# Altium PCB Car-PCB1.PcbDoc (part 4 of 4)
Units mil, origin at the board's own origin, x right, y up, seen from the top; angles counter-clockwise.
Board outline 2206 x 4474.17 mil, 4 copper layers (L1_Top, L2_GND, L3_PWR, L4_BOT), stack 60.912 mil thick; 163 components, 139 nets, 610 pads, 297 vias.
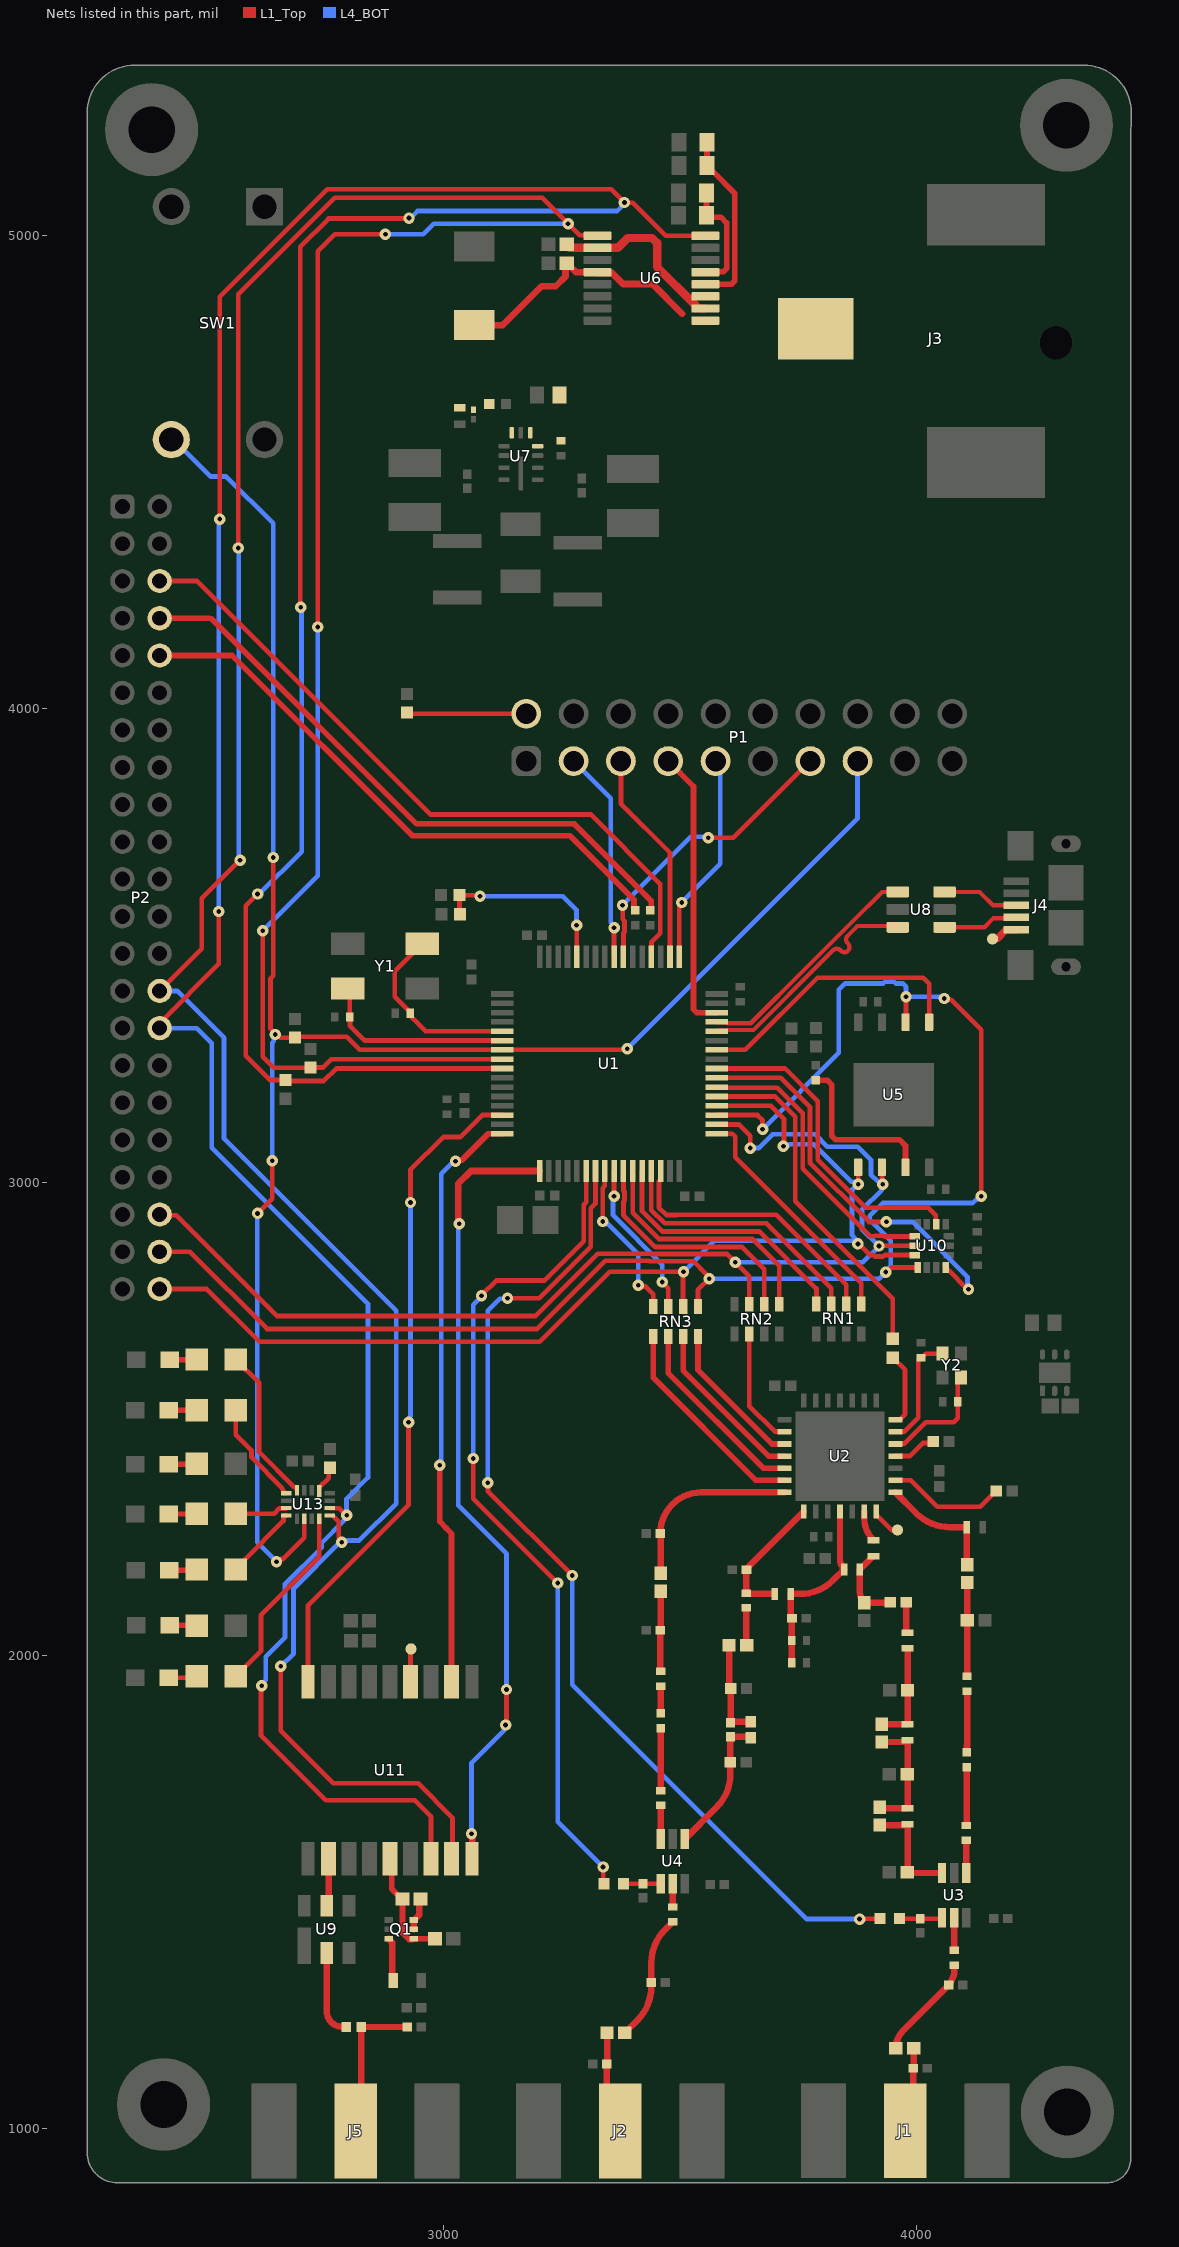
[diagram p5: the nets of this part, all layers, seen from the top]

## Via types
v1: diameter 24, hole 10, L1_Top to L4_BOT, 281 vias
v2: diameter 19.68, hole 7.87, L1_Top to L4_BOT, 16 vias

## Nets (pads, with @x,y where several pads share a name; then routed paths per layer and width w, separated by ;. In a path a pad name is that pad's centre, name@x,y a point inside that pad or via, vN(x,y) a via of type N, cw(c..) or ccw(c..) an arc to the next point about the centre after c; other vN are vias at no path point) (continued)
GPS_RESET#: U1.14 U11.9 | length 1412.7
  L1_Top w10: U11.9@2714.57,1944.88 2714.57,2105.57 2927,2318 v1(2927,2493) ; v1(2931,2957) 2931,3026 3000.37,3095.37 3036.37,3095.37 3082.73,3141.73 U1.14@3125.02,3141.73
  L4_BOT w10: v1(2927,2493) 2929.68,2495.68 2929.68,2504.54 2931,2505.86 v1(2931,2957)
GPS_SAFEBOOT#: U1.17 U11.18 | length 1683.9
  L1_Top w10: v1(3132,1853) 3132,1859 3134,1861 v1(3134,1928)
  L1_Top w13.78: v1(3034,2912) 3032.04,2913.96 3032.04,2921.18 3032,2921.23 3032,2997 3058.62,3023.62 U1.17@3203.76,3023.62 ; v1(3060,1623.3) 3061.02,1622.28 U11.18@3061.02,1570.87
  L4_BOT w10: v1(3034,2912) 3032,2910 3032,2317 3134,2215 v1(3134,1928) ; v1(3060,1623.3) 3060,1773 3129.32,1842.32 3129.32,1850.32 v1(3132,1853)
GPS_TX_READY: U1.16 U11.2 | length 1248.6
  L1_Top w11.81: v1(2993,2402) 2993,2282.7 3006.09,2269.61 3006.09,2269.01 3017.72,2257.39 U11.2@3017.72,1944.88 ; v1(3026,3044) 3028.33,3046.33 3039.33,3046.33 3095.36,3102.36 U1.16@3125.02,3102.36
  L4_BOT w10: v1(2993,2402) 2995.68,2404.68 2995.68,2414.54 2996,2414.86 2996,3018 3015,3037 3015.21,3037 3022.21,3044 v1(3026,3044)
Header_LED: D8.2 U13.4 | length 332.2
  L1_Top w9.84: D8.2@2562.09,2625.2 2611,2576.28 2611,2429.88 2685.31,2355.57 2690.45,2355.57 2690.95,2355.08 U13.4@2690.95,2349.41
I2C2_SCL: P2.28 R5.1 U1.8 U6.9 U11.17 U13.13 | length 7748.3
  L1_Top w10: P2.28@2401,3404.12 2490,3493.12 2490,3599.64 v1@2570.68,3680.32 ; v1(2567,4340) 2567,4876 2771,5080 3209,5080 v1(3264,5025) 3288.4,5000.6 3324.79,5000.6 U6.9@3325.83,4999.57 ; v1(2619,3531) 2619,3265 2642,3242 R5.1@2720,3242 ; v1(2657,1977) 2657,1841 2768,1730 2947,1730 3019.68,1657.32 3019.68,1572.83 U11.17@3017.72,1570.87 ; R5.1@2720,3242.32 2746.32,3242.32 2763.84,3259.84 U1.8@3125.02,3259.84 ; v1(2735,4173) 2735,4967 2771,5003 v1(2878,5003) ; U13.13@2766.65,2294.96 2779.32,2282.29 2779.32,2249.47 2785.56,2243.23 v1(2785.56,2239.44)
  L4_BOT w10: P2.28@2401,3404.12 2437.88,3404.12 2537,3305 2537,3092 2900.74,2728.26 2900.74,2320.74 2823,2243 2798.41,2243 2797.54,2242.12 2788.24,2242.12 v1(2785.56,2239.44) ; v1(2567,4340) 2568,4339 2568,3686.79 2571,3683.79 v1(2571,3680) ; v1(2619,3531) 2735,3647 v1(2735,4173) ; v1(2657,1977) 2684,2004 2684,2141.44 v1@2782.88,2240.32 ; v1(2878,5003) 2958,5003 2980,5025 v1(3264,5025)
I2C2_SDA: P2.30 R6.1 U1.9 U6.8 U11.16 U13.14 | length 8198.8
  L1_Top w10: P2.30@2401,3325.38 2401,3336.19 2526,3461.19 v1(2526,3572) ; v1(2528,4401) 2528,4871 2755,5098 3355,5098 3383.59,5069.41 3400.59,5069.41 3470.43,4999.57 U6.8@3554.17,4999.57 ; v1(2608,3609) 2583,3584 2583,3267 2634.32,3215.68 R6.1@2667,3215.68 ccw(c2668.68,3215.68) 2668.68,3214 2748,3214 2774.16,3240.16 U1.9@3125.02,3240.16 ; v1(2617,1936) 2615,1934 2615,1831 2752,1694 2939.86,1694 2974.41,1659.45 U11.16@2974.41,1570.87 ; v1(2699,4215) 2698,4216 2698,4976 2758,5036 2927,5036 v1(2928,5037) ; U13.14@2760.57,2311.28 2780.72,2311.28 2795.74,2296.26 v1(2796.32,2296.26)
  L4_BOT w10: P2.30@2401,3325.38 2479.62,3325.38 2511,3294 2511,3073 2841,2743 2841,2376 2796,2331 v1@2796,2296.26 ; v1(2526,3572) 2526,4399 v1(2528,4401) ; v1(2608,3609) 2611.79,3609 2701,3698.21 2701,4064.14 2700.68,4064.46 2700.68,4213.32 v1(2699,4215) ; v1(2617,1936) 2617,1939.79 2625,1947.79 2625,1997 2666,2038 2666,2151 2743,2228 2743,2237 2790.2,2284.2 2790.2,2286.35 2796.32,2292.47 v1(2796.32,2296.26) ; v1(2928,5037) 2930.86,5037 2945.86,5052 3368.14,5052 3383,5066.86 v1(3383,5070)
IMU_INT1: U1.39 U10.4 | length 877.8
  L1_Top w10: U1.39@3577.77,3220.47 3713.53,3220.47 3775,3159 3775,3041 3900,2916 3936,2916 v1(3936.56,2916.56) ; U10.4@4059.75,2826.12 4061.64,2824.23 U10.4@4061.64,2819.8 4061.64,2815.37 4063.53,2813.48 4067.96,2813.48 4107.44,2774 v1(4110,2774)
  L4_BOT w10: v1(3936.56,2916.56) 3937.11,2916 3992,2916 4107.91,2800.09 4107.91,2776.09 v1(4110,2774)
IMU_INT2: U1.40 U10.9 | length 683.2
  L1_Top w9.84: U1.40@3577.77,3240.16 3722.52,3240.16 3791.84,3170.84 3791.84,3047.16 3893,2946 4025,2946 4041.11,2929.89 4041.11,2912.18 U10.9@4041.96,2911.33
IMU_LED: D7.2 U13.5 | length 222.9
  L1_Top w9.84: D7.2@2561.71,2518.12 2561.71,2466.53 2595.26,2432.98 2595.26,2418.46 2660.16,2353.56 2660.16,2351.18 2662.4,2348.94 2662.4,2343.27 2668.07,2343.27 U13.5@2668.56,2342.78
JTCK_SWCLK: P1.9 U1.49 | length 453.4
  L1_Top w10: U1.49@3499.03,3476.38 3499.03,3582.25 3504,3587.21 v1(3504,3591)
  L4_BOT w10: v1@3504.09,3591.09 3585.73,3672.73 3585.73,3879.62 P1.9@3575.59,3889.76
JTDI: P1.5 U1.50 | length 456.4
  L1_Top w10: P1.5@3375.59,3889.76 3375.59,3799.41 3479.35,3695.65 U1.50@3479.35,3476.38
JTDO_SWO: P1.13 U1.55 | length 636.4
  L1_Top w10: v1(3379,3585) 3379.7,3584.3 3379.7,3555.36 3383.24,3551.82 3383.24,3528.65 3380.92,3526.33 U1.55@3380.92,3476.38 ; v1(3560,3728) 3613,3728 3774.76,3889.76 P1.13@3775.59,3889.76
  L4_BOT w10: v1(3379,3585) 3379,3586 3424,3631 3523,3730 3558,3730 v1(3560,3728)
JTMS_SWDIO: P1.7 U1.46 | length 598.3
  L1_Top w11.81: P1.7@3475.59,3889.76 3529,3836.35 3529,3365.19 3535.92,3358.27 U1.46@3577.77,3358.27
JTRST: P1.3 U1.56 | length 448.9
  L1_Top w10: U1.56@3361.24,3476.38 v1(3361.24,3537.76)
  L4_BOT w10: P1.3@3275.59,3889.76 3354,3811.35 3354,3548.79 3361.24,3541.55 v1(3361.24,3537.76)
LoRa_DIO_0: RN1.5 U1.33 | length 505.9
  L1_Top w10: U1.33@3577.77,3102.36 3611.14,3102.36 3617,3096.5 3617,3053 3883.24,2786.76 RN1.5@3883.24,2742.5
LoRa_DIO_1: RN1.6 U1.30 | length 583.3
  L1_Top w10: U1.30@3459.66,3023.62 3459.66,3005.91 3455.88,3002.13 3455.88,2946.33 3471.53,2930.68 3493.67,2930.68 3493.99,2931 3704,2931 3851.75,2783.25 RN1.6@3851.75,2742.5
LoRa_DIO_2: RN1.7 U1.29 | length 564.6
  L1_Top w10: U1.29@3439.98,3023.62 3439.98,2941.02 3468,2913 3683,2913 3820.25,2775.75 RN1.7@3820.25,2742.5
LoRa_DIO_3: RN1.8 U1.28 | length 553.8
  L1_Top w10: U1.28@3420.29,3023.62 3420.29,2938.71 3463,2896 3668,2896 3788.76,2775.24 RN1.8@3788.76,2742.5
LoRa_DIO_4: RN2.5 U1.27 | length 525.2
  L1_Top w10: U1.27@3400.61,3023.62 3400.61,2935.39 3456,2880 3653,2880 3710,2823 RN2.5@3710,2742
LoRa_DIO_5: RN2.6 U1.26 | length 514.6
  L1_Top w10: U1.26@3380.92,3023.62 3380.92,2981.67 3383.24,2979.35 3383.24,2961.13 3380.92,2958.81 3380.92,2930.08 3448,2863 3632,2863 3678.5,2816.5 RN2.6@3678.5,2742
LoRa_FEM_CPS: R11.1 U1.23 | length 2157.9
  L1_Top w10: v1(3094,2365) 3094.59,2364.41 3094.59,2347.41 v1(3273,2169) ; v1(3136,2755) 3203,2755 3312,2864 3312,2945 3321.87,2954.87 U1.23@3321.87,3023.62 ; v1(3879.92,1442.91) 3880.91,1443.9 R11.1@3923.23,1443.9
  L4_BOT w10: v1(3094,2365) 3094,2728 3119.41,2753.41 3134.41,2753.41 v1(3136,2755) ; v1(3273,2169) 3273,1938 3768.09,1442.91 v1(3879.92,1442.91)
LoRa_FEM_CTX: R14.1 U1.22 | length 1778.7
  L1_Top w10: v1(3063.77,2416) 3063.77,2331.23 v1(3242,2153) ; v1(3081,2760) 3081,2761 3112,2792 3214,2792 3297,2875 3297,2952.63 3302.18,2957.82 U1.22@3302.18,3023.62 ; v1(3338,1553) 3338.58,1552.42 3338.58,1518.7 R14.1@3339.57,1517.72
  L4_BOT w10: v1(3063.77,2416) 3063.77,2741.14 3081,2758.38 v1(3081,2760) ; v1(3242,2153) 3242,1649 v1(3338,1553)
LoRa_LED: D3.2 U13.8 | length 161.5
  L1_Top w10: D3.2@2561.71,2181.49 2580.33,2200.11 2580.33,2202.04 2662.48,2284.19 2662.48,2294.96 2663.05,2295.53 U13.8@2668.56,2295.53
LoRa_Reset#: R18.2 U1.37 | length 738.4
  L1_Top w10: U1.37@3577.77,3181.1 3700.9,3181.1 3744,3138 3744,2960 3950,2754 R18.2@3950,2669
LoRa_RXTX: RN3.8 U1.24 | length 344
  L1_Top w10: v1(3337,2917) 3337,2987.54 3341.55,2992.09 U1.24@3341.55,3023.62 ; v1(3412,2782) 3414.59,2779.41 3427.59,2779.41 3444.01,2762.99 RN3.8@3444.01,2737
  L4_BOT w10: v1(3337,2917) 3340.79,2917 3346.88,2910.91 3349.09,2910.91 3412,2848 v1(3412,2782)
MCU_Reset: P1.15 R3.1 SW1.4 U1.7 U13.10 | length 4210.7
  L1_Top w10: v1(2608,2934) 2639,2965 v1(2639,3045) ; v1(2641,3686) 2641,3436 2635,3430 2635,3324.86 2645,3314.86 v1(2645,3312) 2648.79,3312 2655.79,3305 2686.68,3305 R3.1@2687,3305.32 ; v1(2648,2198) 2651.79,2198 2657.38,2203.59 2661.59,2203.59 2706.69,2248.69 U13.10@2706.69,2288.9 ; R3.1@2687,3307 2796,3307 2823.47,3279.53 U1.7@3125.02,3279.53 3386.53,3279.53 v1(3389,3282)
  L4_BOT w10: SW1.4@2425.57,4568.94 2431.06,4568.94 2509,4491 2542,4491 2641,4392 v1(2641,3686) ; v1(2608,2934) 2607,2933 2607,2239 v1(2648,2198) ; v1(2639,3045) 2639,3294.21 2642.32,3297.53 2642.32,3309.32 v1(2645,3312) ; v1(3389,3282) 3875.59,3768.59 P1.15@3875.59,3889.76
MISO_sx: RN3.4 U2.17 | length 318.4
  L1_Top w11.81: RN3.4@3538.5,2674.01 3538.5,2603.5 3695.15,2446.85 U2.17@3721.46,2446.85
MOSI_sx: RN3.3 U2.18 | length 361.3
  L1_Top w11.81: RN3.3@3507,2674.01 3507,2602 3687.74,2421.26 U2.18@3721.46,2421.26
NetC9_1: C9.1 C10.1 L15.2 | length 198.5
  L1_Top w13.64: C10.1@4107,1955.75 4107.16,1955.91 C9.1@4107.16,2074 4107,2074.16 L15.2@4107,2154.16
NetC10_2: C10.2 R8.1 | length 116.3
  L1_Top w13.64: 4106.3,1808.15 ccw(c4104.61,1809.84) 4107,1809.84 C10.2@4107,1924.25
NetC11_1: C11.1 R8.2 | length 123.4
  L1_Top w13.64: C11.1@4105.32,1640.75 4106.3,1641.73 R8.2@4106.3,1763.78
NetC11_2: C11.2 U3.1 | length 68.9
  L1_Top w13.64: U3.1@4105.32,1540.35 C11.2@4105.32,1609.25
NetC15_1: C15.1 C65.1 L3.1 L12.2 | length 214.9
  L1_Top w13.64: C15.1@3927,1854.84 ccw(c3928.23,1856.07) 3928.23,1854.33 L3.1@3981.3,1854.33 C65.1@3981.3,1926.18 L12.2@3981.3,2014.76
NetC15_2: C15.2 C19.1 C62.1 L3.2 L4.1 | length 259.1
  L1_Top w13.64: C62.1@3922.24,1679.27 ccw(c3927.34,1684.37) 3927.34,1677.17 L4.1@3981.3,1677.17 3981.3,1746.98 ccw(c3978.42,1746.98) C19.1@3980.46,1749.02 ccw(c3978.42,1751.05) 3981.3,1751.05 L3.2@3981.3,1820.87 cw(c3972.35,1829.82) 3972.35,1817.16 C15.2@3927,1817.16
NetC16_1: C16.1 C18.1 L2.2 L5.2 | length 168.5
  L1_Top w13.64: L2.2@3909.45,2209.65 ccw(c3909.45,2207.06) 3907.62,2208.89 L5.2@3880.73,2182 3880.73,2133.16 ccw(c3911.57,2133.16) C18.1@3889.76,2111.36 3942.84,2111.36 ccw(c3942.84,2114.24) C16.1@3944.88,2112.2
NetC16_2: C16.2 L12.1 | length 64.7
  L1_Top w13.64: C16.2@3978.63,2112.2 3978.63,2054.68 ccw(c3987.75,2054.68) L12.1@3981.3,2048.23
NetC17_1: C17.1 U3.5 | length 68.9
  L1_Top w13.64: C17.1@4079.72,1376.97 U3.5@4079.72,1445.87
NetC17_2: C17.2 C63.1 L13.1 | length 222.1
  L1_Top w13.64: L13.1@3956.55,1170.28 cw(c4008.43,1170.28) 3971.75,1206.96 C63.1@4068.44,1303.65 4070.93,1306.14 4079.24,1324.81 ccw(c4041.21,1330.89) 4079.72,1330.89 4079.72,1344.42 C17.2@4079.72,1345.47
NetC20_1: C20.1 C62.2 L4.2 U3.3 | length 235.4
  L1_Top w13.64: C62.2@3922.24,1641.59 3976.21,1641.59 ccw(c3976.21,1648.79) L4.2@3981.3,1643.7 3981.3,1544.36 cw(c3978.42,1544.36) C20.1@3980.46,1542.32 ccw(c3985.21,1547.08) 3985.21,1540.35 U3.3@4054.13,1540.35
NetC21_1: C21.1 C22.1 C31.1 L5.1 L6.2 U2.25 | length 401.4
  L1_Top w13.64: C22.1@3736.22,1984.25 C21.1@3736.22,2031.5 ccw(c3734.19,2033.53) 3737.06,2033.53 C31.1@3737.06,2078.74 cw(c3743.85,2085.53) 3734.25,2085.53 L6.2@3734.25,2129.92 3753.77,2129.92 ccw(c3753.77,2229.92) 3824.48,2159.21 L5.1@3847.27,2182 cw(c3868.24,2202.97) 3838.58,2202.97 U2.25@3838.58,2304.13
NetC23_1: C23.1 R11.2 U3.4 | length 92.5
  L1_Top w10: R11.2@3964.57,1443.9 4054.13,1443.9 U3.4@4054.13,1445.87 ; C23.1@4010,1444.9 C23.1@4010,1445.89
NetC24_1: C24.1 C35.1 L7.2 L8.1 | length 208.6
  L1_Top w13.64: L7.2@3604.16,2022 3604.16,1937.76 ccw(c3614.72,1937.76) C35.1@3607.25,1930.29 L8.1@3607.25,1858.16 ; C24.1@3650,1859.87 3611.75,1859.87 ccw(c3611.75,1853.15) L8.1@3607.26,1858.15 ; L8.1@3607.26,1858.15 ccw(c3611.75,1853.15) L8.1@3607,1857.9 L8.1@3607.25,1858.16
NetC24_2: C24.2 C36.1 L8.2 U4.1 | length 295
  L1_Top w13.64: U4.1@3510.83,1612.2 3577.71,1679.09 ccw(c3507,1749.8) 3607,1749.8 C36.1@3607,1774 L8.2@3607,1828.1 3645.25,1828.1 cw(c3645.25,1821.38) C24.2@3650,1826.13
NetC29_1: C29.1 U2.2 | length 250.2
  L1_Top w10: U2.2@3955.71,2370.08 3987.92,2370.08 4044.02,2313.98 4134.84,2313.98 4161.19,2340.33 4161.19,2341.17 4167.46,2347.44 C29.1@4168.31,2347.44
NetC30_1: C30.1 U2.4 | length 92.2
  L1_Top w10: U2.4@3955.71,2421.26 3986.26,2421.26 4013.87,2448.87 4032,2448.87 C30.1@4035.13,2452
NetC32_1: C32.1 C33.1 L6.1 U2.22 | length 282.4
  L1_Top w13.64: C33.1@3642.37,2184.69 ccw(c3645.98,2181.1) C33.1@3640.89,2181.1 3640.89,2132.03 ccw(c3645.98,2137.12) 3645.98,2129.92 L6.1@3700.79,2129.92 ; C33.1@3642.38,2184.7 U2.22@3761.81,2304.13
NetC32_2: C32.2 L7.1 | length 79.2
  L1_Top w13.64: L7.1@3640.75,2021.15 C32.2@3640.75,2100.4
NetC37_1: C37.1 C40.1 L9.2 | length 170.3
  L1_Top w13.64: C37.1@3459.65,1966.53 cw(c3459.65,1967.38) 3458.8,1967.38 C40.1@3458.8,2053.15 ccw(c3458.8,2053.99) 3459.65,2053.99 L9.2@3459.65,2135.83
NetC37_2: C37.2 R10.1 | length 58.3
  L1_Top w13.64: C37.2@3459,1935.04 C37.2@3459.65,1935.04 3460,1935.04 R10.1@3460,1877.75
NetC38_1: C38.1 R10.2 | length 132
  L1_Top w13.64: C38.1@3459.65,1714.56 3460,1714.56 R10.2@3460,1846.25
NetC38_2: C38.2 U4.3 | length 70.9
  L1_Top w13.64: U4.3@3459.65,1612.2 C38.2@3459.65,1683.07
NetC39_1: C39.1 U4.5 | length 49.2
  L1_Top w13.64: C39.1@3485.24,1468.5 U4.5@3485.24,1517.72
NetC39_2: C39.2 C66.1 L14.1 | length 267.6
  L1_Top w13.64: L14.1@3384,1202.76 3410.53,1229.29 ccw(c3339.82,1300) 3439.82,1300 C66.1@3439.82,1309.06 3439.82,1350.17 cw(c3539.82,1350.17) 3469.11,1420.88 C39.2@3485.24,1437.01
NetC41_2: C41.2 R14.2 U4.4 | length 78.7
  L1_Top w10: R14.2@3380.91,1517.72 U4.4@3459.65,1517.72
NetC42_1: C42.1 U2.6 Y2.1 | length 240.4
  L1_Top w10: U2.6@3955.71,2472.44 3956.61,2473.35 3975.35,2473.35 4004,2502 4004,2620.69 4004.84,2621.54 4004.84,2626.55 4007.72,2629.43 C42.1@4009.68,2629.43 4011.65,2629.43 4019.45,2637.22 4053.9,2637.22 Y2.1@4054.96,2638.28
NetC45_2: C45.2 U7.5
NetC46_1: C46.1 U7.4
NetC50_1: C50.1 R19.1 R20.2 U7.7
NetC55_1: C55.1 J5.1 L11.1 | length 322.6
  L1_Top w13.64: J5.1@2814.96,995.08 2827,1007.12 C55.1@2827,1215 2922.54,1215 L11.1@2924.07,1216.54
NetC55_2: C55.2 U9.2 | length 184.9
  L1_Top w13.64: U9.2@2753.94,1371.26 2753.94,1248.96 ccw(c2787.84,1248.96) C55.2@2795.19,1215.86 ; C55.2@2795.5,1215 2796.03,1215.53 C55.2@2797.26,1215.53
NetC60_1: C60.1 U2.5 Y2.3 | length 242.9
  L1_Top w10: U2.5@3955.71,2446.85 3956.61,2447.76 3974.76,2447.76 4020,2493 4079,2493 4087.44,2501.44 C60.1@4087.44,2535.92 4087.44,2580.21 Y2.3@4094.33,2587.1
NetC61_1: C61.1 L9.1 U2.21 | length 396.9
  L1_Top w13.64: L9.1@3459.65,2173.51 3459.65,2257.03 ccw(c3458.8,2257.03) C61.1@3458.8,2257.87 cw(c3545.42,2257.87) 3545.42,2344.49 U2.21@3721.46,2344.49
NetC64_1: C64.1 J1.1 L13.2 | length 179
  L1_Top w13.64: J1.1@3976.38,996.06 ccw(c3936.02,1036.42) 3993.1,1036.42 C64.1@3993.1,1128 ccw(c3990.35,1130.75) 3994.23,1130.75 L13.2@3994.23,1170.28
NetC67_1: C67.1 J2.1 L14.2 | length 215.3
  L1_Top w13.64: L14.2@3346.32,1202.76 3346.32,1138 cw(c3344.91,1138) C67.1@3345.9,1137 3345.9,1062.95 ccw(c3441.88,1062.95) J2.1@3374.02,995.08
NetD2_1: D2.1 R13.1 | length 57.1
  L1_Top w12: R13.1@2422.43,2064 2477.75,2064 D2.1@2479.04,2062.72
NetD3_1: D3.1 R26.1 | length 58.2
  L1_Top w12: R26.1@2421.43,2180 2477.55,2180 D3.1@2479.04,2181.49
NetD4_1: D4.1 R27.1 | length 58.8
  L1_Top w10: R27.1@2420.43,2299 2478.65,2299 D4.1@2479.04,2299.39
NetD5_1: D5.1 R28.1 | length 59.7
  L1_Top w9.84: R28.1@2420.43,1953 2476.28,1953 D5.1@2479.04,1955.76
NetD6_1: D6.1 R31.1 | length 59.6
  L1_Top w12: R31.1@2420,2404 2477.78,2404 D6.1@2479.04,2405.25
NetD7_1: D7.1 R32.1 | length 58.7
  L1_Top w12: R32.1@2420.43,2518 2478.92,2518 D7.1@2479.04,2518.12
NetD8_1: D8.1 R34.1 | length 57.1
  L1_Top w12: R34.1@2422.43,2625 2479.21,2625 D8.1@2479.41,2625.2
NetJ4_1: J4.1 TP1.1 | length 57.8
  L1_Top w15.75: TP1.1@4161,3514 4162.51,3515.51 4171.91,3515.51 4190.23,3533.82 J4.1@4210.62,3533.82
NetJ4_2: J4.2 U8.1 | length 160
  L1_Top w8.9: U8.1@4059.41,3538.6 4143.6,3538.6 4162.83,3557.83 4209.26,3557.83 J4.2@4210.83,3559.41
NetJ4_3: J4.3 U8.3 | length 163.2
  L1_Top w8.9: U8.3@4059.41,3613.4 4133.6,3613.4 4162,3585 J4.3@4210.83,3585
NetL1_2: L1.2 L15.1 U2.1 | length 256.1
  L1_Top w13.64: U2.1@3955.71,2344.49 3999.91,2300.29 ccw(c4070.62,2371) 4070.62,2271 L1.2@4106.27,2271 4106.27,2193.61 ccw(c4108.77,2193.61) L15.1@4107,2191.84
NetL2_1: L2.1 U2.27 | length 66.3
  L1_Top w13.64: U2.27@3889.76,2304.13 3889.76,2290.63 ccw(c3956.97,2290.63) L2.1@3909.45,2243.11
NetP1_2: P1.2 R9.1 | length 252.3
  L1_Top w10: R9.1@2924,3992.32 ccw(c2930.16,3998.47) 2930.16,3989.76 P1.2@3175.59,3989.76
NetP2_8: P2.8 R29.1 | length 1301.6
  L1_Top w12: P2.8@2401,4191.52 2506.48,4191.52 ; 2510.54,4190.46 2944,3757 3277,3757 3439.42,3594.58 3439.42,3576.17 R29.1@3438,3574.75
NetP2_10: P2.10 R30.1 | length 1239.1
  L1_Top w12: P2.10@2401,4112.78 2554.22,4112.78 2935,3732 3268,3732 3403.14,3596.86 3403.14,3577.61 R30.1@3406,3574.75
NetQ1_3: Q1.3 R12.1 | length 92.3
  L1_Top w13.78: Q1.3@2884.84,1401.57 2885.83,1400.59 2886.81,1400.59 2886.81,1399.16 2892.47,1393.5 R12.1@2892.47,1313
NetQ1_5: Q1.5 Q1.6 R16.2 | length 70
  L1_Top w13.78: Q1.5@2937.99,1421.26 Q1.6@2937.99,1440.94 2938.98,1440.94 2950.03,1452 2950.03,1483.33 R16.2@2951.7,1485
NetR1_1: R1.1 R2.1 U1.60 | length 396.8
  L1_Top w10: R2.1@3035.68,3570 3034.68,3571 R1.1@3034.68,3607 3035.68,3606 3076,3606 v1(3078,3604) ; v1(3282,3543) 3282.5,3542.5 U1.60@3282.5,3476.38
  L4_BOT w10: v1(3078,3604) 3253,3604 3282,3575 v1(3282,3543)
NetR4_2: R4.2 U5.7 | length 356.2
  L1_Top w11.81: R4.2@3787,3215.25 3811.75,3215.25 3821,3206 3821,3098 3829,3090 3964,3090 3977,3077 U5.7@3977,3031.31
NetR33_2: R33.2 U13.1 | length 50.3
  L1_Top w9.84: U13.1@2738.68,2355.57 2757.97,2374.86 2757.97,2393.8 R33.2@2760.83,2396.65
NetTP2_1: TP2.1 U11.4 | length 69.3
  L1_Top w10: U11.4@2931.1,1944.88 2931.1,2012.8 TP2.1@2932.09,2013.78
NetTP3_1: TP3.1 U2.28 | length 66
  L1_Top w10: U2.28@3915.35,2304.13 3915.35,2295.28 3916.26,2294.37 3918.47,2294.37 3947.84,2265 TP3.1@3960,2265
NetU9_5: U9.5 U11.11 | length 103.5
  L1_Top w13.64: U9.5@2753.94,1471.26 2757.87,1471.26 U11.11@2757.87,1570.87
NRESET_sx: R18.1 U2.7 | length 155.8
  L1_Top w10: R18.1@3950,2629.46 3976,2603.46 3976,2509.46 3965.47,2498.94 3964.57,2498.03 U2.7@3955.71,2498.03
NSS_sx: RN3.2 U2.19 | length 406.6
  L1_Top w11.81: RN3.2@3475.5,2674.01 3475.5,2596.5 3676.33,2395.67 U2.19@3721.46,2395.67
OSC_IN: C13.1 U1.5 Y1.1 | length 396.1
  L1_Top w10: C13.1@2930.75,3357 2932.62,3355.13 2932.62,3349.22 2962.95,3318.9 U1.5@3125.02,3318.9 ; C13.1@2930.89,3359.11 2897.75,3392.25 2897.75,3445.52 Y1.1@2956.06,3503.84
OSC_OUT: C14.1 U1.6 Y1.3 | length 415.4
  L1_Top w10: Y1.3@2798.58,3409.35 2802.52,3405.41 C14.1@2802.52,3349.14 2802.52,3347.17 2803.08,3346.61 2803.08,3330.78 2834.65,3299.21 U1.6@3125.02,3299.21
PMON_A0: R17.1 R24.2 U6.5 | length 236.4
  L1_Top w11.81: U6.5@3554.17,4922.8 3554.94,4923.56 3592.08,4923.56 3599,4930.48 3599,5026.97 3586.98,5038.99 3560.54,5038.99 R17.1@3556.53,5043 3556.48,5043.05 R24.2@3556.48,5085.67 ; R24.2@3557.43,5100.72 R24.2@3557.48,5100.67
PMON_A1: R23.1 R25.2 U6.4 | length 380
  L1_Top w11.81: U6.4@3554.17,4897.2 3609.08,4897.2 3616,4904.12 3616,5089.53 3571.31,5134.22 3567.37,5134.22 3557.53,5144.06 R23.1@3557.53,5148 ; R23.1@3557.43,5148 R25.2@3557.43,5192.91
PMON_LED: D4.2 U13.7 | length 111.8
  L1_Top w10: D4.2@2561.71,2299.39 2642.76,2299.39 2653.91,2310.53 2658.57,2310.53 2658.74,2310.71 2667.99,2310.71 U13.7@2668.56,2311.28
PWR_JACK: C43.2 C44.2 D1.1 J3.1 U6.1 U6.2 U6.3 U6.10 U6.12 | length 1023.1
  L1_Top w12: 3492.86,4897 3530.65,4859.22 3530.65,4855.35 3530.65,4848.88 3533.5,4846.02 U6.2@3543.84,4846.02
  L1_Top w14: D1.1@3066,4810.93 3125.93,4810.93 3208,4893 3238,4893 3258.5,4913.5 3258.5,4939.21 C43.2@3261.29,4942 3262.08,4942 3267.39,4936.69 3267.39,4935.9 3280.5,4922.8 U6.12@3325.83,4922.8 3327.69,4920.94 3357.06,4920.94 3380.12,4897.88 3442.12,4897.88 3505,4835
  L1_Top w17.72: C44.2@3262.08,4982 C44.2@3261.29,4982 ccw(c3269.32,4982) 3269.32,4973.98 U6.10@3325.83,4973.98 3368.98,4973.98 3390,4995 3441.62,4995 3452,4984.62 3452,4934 3530.65,4855.35 3533.5,4852.5 U6.2@3533.5,4846.02 ; U6.2@3543.84,4846.02 U6.2@3554.17,4846.02
Regulator_LED: D5.2 U13.12 | length 406.2
  L1_Top w9.84: D5.2@2561.71,1955.76 2615,2009.04 2615,2085 2738.19,2208.19 U13.12@2738.19,2288.9
RXTX_RF_sx: RN3.1 U2.20 | length 454.3
  L1_Top w11.81: RN3.1@3444.01,2674.01 3444.01,2586.99 3660.92,2370.08 U2.20@3721.46,2370.08
SCK_sx: RN2.2 U2.16 | length 249.1
  L1_Top w10: RN2.2@3647.01,2679.01 3647.01,2526.99 3700.65,2473.35 3720.55,2473.35 U2.16@3721.46,2472.44
SPI2_MISO: P2.42 RN3.5 U1.35 U5.2 U10.1 | length 3470.2
  L1_Top w10: P2.42@2401,2852.94 2465.06,2852.94 2628,2690 3199,2690 3343,2834 3434.57,2834 3435.57,2833 3529,2833 3555,2807 3555,2806.79 3562,2799.79 v1(3562,2796) 3538.5,2772.5 RN3.5@3538.5,2737 ; U1.35@3577.77,3141.73 3664.11,3141.73 3675,3130.84 v1(3675,3112) ; v1(3935,2810) 3938.06,2810 3947.86,2819.8 U10.1@4002.59,2819.8 ; U5.2@3977,3338 3978,3339 v1(3978,3392) ; v1(4059,3388) 4061.68,3385.32 4073.68,3385.32 4137,3322 v1(4137,2970)
  L4_BOT w10: v1(3562,2796) 3921,2796 v1(3935,2810) 3935,2811.86 3946,2822.86 3946,2876 3901.64,2920.36 3901.64,2928.64 3929,2956 4119.14,2956 4126.14,2963 4126.21,2963 4133.21,2970 v1(4137,2970) ; v1(3675,3112) 3836,3273 3836,3406.14 3849.86,3420 3929.89,3420 3933.89,3424 3952.11,3424 3956.11,3420 3971,3420 3978,3413 v1(3978,3392) 4051.21,3392 4055.21,3388 v1(4059,3388)
SPI2_MOSI: P2.44 RN3.6 U1.36 U5.5 U10.14 | length 2389.8
  L1_Top w10: P2.44@2401,2774.2 2500.8,2774.2 2612,2663 3204,2663 3352,2811 v1(3508,2811) 3507,2810 RN3.6@3507,2737 ; U1.36@3577.77,3161.42 3692.58,3161.42 3720,3134 3720,3077 v1(3719,3076) ; v1(3876.35,2869.58) 3878.42,2869.58 3902.12,2845.88 3909.01,2845.88 3911.89,2843 3930.11,2843 3932.99,2845.88 U10.14@3996.19,2845.88 ; v1(3877,2995.8) U5.5@3877,3031.31
  L4_BOT w10: v1(3508,2811) 3573,2876 v1@3872,2876 ; v1(3719,3076) 3721.68,3078.68 3730.54,3078.68 3731.86,3080 3783,3080 3861.91,3001.09 3867.92,3001.09 3873.21,2995.8 v1@3875.39,2995.8 ; v1(3876.35,2869.58) 3876.35,2871.65 v1@3872,2876 ; v1(3877,2995.8) v1@3875.39,2995.8 ; v1@3872,2876 3872,2879.79 3864,2887.79 3864,2984.41 v1@3875.39,2995.8
SPI2_SCK: P2.40 RN2.7 U1.34 U5.6 U10.13 | length 2524.2
  L1_Top w10: P2.40@2401,2931.68 2402.41,2930.27 2435.73,2930.27 2649,2717 3195,2717 3327,2849 3440.79,2849 3441.79,2848 3600,2848 v1(3617,2831) 3647.01,2800.99 RN2.7@3647.01,2742 ; U1.34@3577.77,3122.05 3625.02,3122.05 3649,3098.07 v1(3649,3072) ; v1(3921,2865) 3921.57,2865.57 U10.13@3996.19,2865.57 ; U5.6@3927,3031.31 3927.51,3030.8 3927.51,2997.3 v1(3929,2995.8)
  L4_BOT w10: v1(3617,2831) 3887,2831 v1(3921,2865) 3885,2901 3885,2942 3926.41,2983.41 v1@3926.41,2995.8 ; v1(3649,3072) 3649.09,3072.09 3667.09,3072.09 3696,3101 3786,3101 3812,3075 3876,3075 3904,3047 3904,3016 3918.32,3001.68 3919.34,3001.68 3925.21,2995.8 v1@3926.41,2995.8 ; v1@3927.4,2997.4 3926.41,2996.41 v1@3926.41,2995.8 ; v1(3929,2995.8) v1@3926.41,2995.8
SPI_FLASH_CS#: U1.42 U5.1 | length 598.8
  L1_Top w10: U1.42@3577.77,3279.53 3638.53,3279.53 3791,3432 4014,3432 4027,3419 U5.1@4027,3338
SPI_GPIO_CS#: P2.6 U1.52 | length 1484.7
  L1_Top w10: P2.6@2401,4270.26 2479.74,4270.26 2973,3777 3312,3777 3459,3630 3459,3526 3440.05,3507.05 U1.52@3439.98,3476.38 U1.52@3439.98,3476.38
SPI_IMU_CS#: U1.38 U10.12 | length 619.4
  L1_Top w9.84: U1.38@3577.77,3200.79 3578.76,3199.8 3706.2,3199.8 3760,3146 3760,3028 3902.42,2885.58 3910.58,2885.58 3911.92,2886.92 3930.08,2886.92 3931.75,2885.25 U10.12@3996.19,2885.25
SPI_LORA_CS#: RN3.7 U1.25 | length 335.8
  L1_Top w10: v1(3361.24,2970.24) U1.25@3361.24,3023.62 ; v1(3463,2789) 3463,2788.65 3475.5,2776.14 RN3.7@3475.5,2737
  L4_BOT w10: v1(3361.24,2970.24) 3359,2968 3359,2930 3463,2826 v1(3463,2789)
USB_N: U1.44 U8.6 | length 503.7
  L1_Top w8.9: U1.44@3577.77,3318.9 3579.23,3320.36 3599.86,3320.36 3601.3,3321.79 3655.79,3321.79 3806,3472 3824.2,3490.2 cw(c3831.73,3482.67) 3839.26,3490.2 3840.49,3488.98 ccw(c3848.01,3496.51) 3855.54,3488.98 ccw(c3848.01,3496.51) 3855.54,3504.04 3854.32,3505.26 cw(c3861.85,3512.79) 3854.32,3520.32 3875.15,3541.15 3890.37,3541.15 3958.04,3541.15 U8.6@3960.59,3538.6
USB_P: U1.45 U8.4 | length 499
  L1_Top w8.9: U1.45@3577.77,3338.58 3579.23,3337.13 3599.86,3337.13 3601.3,3335.69 3650.04,3335.69 3766.59,3452.24 3865,3550.65 3927.75,3613.4 U8.4@3960.59,3613.4
VCC_RF: C57.1 Q1.4 R16.1 U11.14 | length 240.2
  L1_Top w12: U11.14@2887.8,1570.87 2891.43,1567.23 2891.43,1506.89 2913.32,1485 R16.1@2914.3,1485 2914.3,1413.7 2928,1400 Q1.4@2935.42,1400 ; Q1.4@2937.99,1401.57 C57.1@2982.68,1401.57
pads on no net: J3. J3.3 J4.4 P1.11 P1.17 P1.19 PTH1.1 PTH2.1 PTH3.1 PTH4.1 RN2.1 RN2.8 SW1.2 SW1.3 U1.43 U1.51 U6.7 U6.13 U7.8 U10.10 U10.11 U11.6 U11.15 U13.3

## Polygon pours and split planes (outlines as drawn)
GND on L1_Top "GND_L01_P032" (solid, pour order 32): 4356,2476 4311,2476 4311,2619 4356,2619
+5V on L1_Top "+5V_L01_P027" (solid, pour order 27): 3226,4790 ccw(c3238,4790) 3238,4778 3430,4778 3430,4881 3260,4881 ccw(c3260,4847) 3226,4847
GND on L1_Top "GND_L01_P024" (solid, pour order 24): 2881,4306 3474,4306 3474,4468 3258,4468 3258,4491 3187,4491 3187,4436.5 3222,4436.5 3222,4359 3105.5,4359 3105.5,4435 3142,4435 3142,4491 3076,4491 3076,4475 2881,4475
+3V3 on L1_Top "+3V3_L01_P025" (solid, pour order 25): 3474,4303 3474,4180 2881,4180 2881,4303
GND on L1_Top "GND_L01_P036" (solid, pour order 36): 3180,5005 3171,5005 ccw(c3171,5000) 3166,5000 3166,4912 ccw(c3173,4912) 3173,4905 3187,4905 3214,4905 ccw(c3214,4927) 3236,4927 3236,4991 ccw(c3222,4991) 3222,5005
+5V on L1_Top "+5V_L01_P037" (solid, pour order 37): 4271.86,2687 4268,2690.86 4268,2726.62 4220.76,2726.62 4215,2720.87 4215,2624.5 4272,2624.5 4272,2687
NetC45_2 on L1_Top "NETC45_2_L01_P000" (solid, pour order 0): 3274.55,4602 3197.78,4602 3197.78,4571.69 3178.09,4571.69 3178.09,4623.85 3226.32,4623.85 3226.32,4689.8 3274.55,4689.8
+3V3_RF on L1_Top "+3V3_RF_L01_P034" (solid, pour order 34): 4203,2570 4203,2476 4298,2476 4298,2570
PWR_JACK on L1_Top "PWR_JACK_L01_P026" (solid, pour order 26): 3445,4737 3445,4881 3868,4881 3868,4737
+5V on L1_Top "+5V_L01_P023" (solid, pour order 23): 2882.12,4554.17 2882.12,4576.12 cw(c2889,4576.12) 2889,4583 2997,4583 cw(c2997,4574) 3006,4574 3006,4516 3141,4516 3141,4499 3070,4499 3070,4482 2882,4482 2882,4553 cw(c2888,4553)
+5V on L1_Top "+5V_L01_P022" (solid, pour order 22): 3333,4609 3333,4517 3185,4517 3185,4497 3264,4497 3264,4477 3474,4477 3474,4609
+5V on L1_Top "+5V_L01_P020" (solid, pour order 20): 3069,4530 3069,4540 3069,4541 3141,4541 3141,4530
NetC50_1 on L1_Top "NETC50_1_L01_P011" (solid, pour order 11): 3109,4606 3109,4662 3021,4662 3021,4626 3079,4626 3079,4589 3138,4589 3138,4570 3150,4570 3150,4606
NetC46_1 on L1_Top "NETC46_1_L01_P010" (solid, pour order 10): 3297,4580 3297,4550 3187,4550 3187,4561 3188,4562 3226,4562 3226,4580
GND on L1_Top "GND_L01_P002" (solid, pour order 2): 3287,4635.66 3387,4635.66 3387,4759 2883,4759 2883,4621 3005,4621 3005,4688 3122,4688 3122,4625 3157.43,4625 3157.43,4571.69 3171.2,4571.69 3171.2,4635.66 3216.48,4635.66 3216.48,4702 3287,4702
GND on L2_GND (split plane): 2348,5339.9 4354,5339.9 4354.63,5339.97 4361.84,5339.61 4369.61,5338.46 4377.22,5336.55 4384.61,5333.91 4391.71,5330.55 4398.44,5326.51 4404.75,5321.84 4410.57,5316.57 4415.84,5310.75 4420.51,5304.44 4424.55,5297.71 4427.91,5290.61 4430.55,5283.22 4432.46,5275.61 4433.61,5267.84 4433.96,5260.82 4433.91,5260.4 4432.66,5198.4 4432.68,5198.2 4432.66,5198 4432.66,935.83 4432.71,935.32 4432.38,931.13 4431.28,926.56 4429.48,922.21 4427.02,918.2 4423.96,914.62 4420.39,911.56 4416.37,909.1 4412.03,907.3 4407.45,906.2 4403.26,905.87 4402.76,905.92 2311.17,905.92 2310.64,905.87 2305.56,906.2 2300.02,907.3 2294.68,909.12 2289.61,911.62 2284.92,914.75 2280.68,918.47 2276.96,922.72 2273.82,927.41 2271.32,932.47 2269.51,937.82 2268.41,943.35 2268.07,948.45 2268.13,948.99 2268.13,949 2268.13,5191 2268.13,5191.01 2268.1,5260 2268.1,5260.01 2268.03,5260.63 2268.39,5267.84 2269.54,5275.61 2271.45,5283.22 2274.09,5290.61 2277.45,5297.71 2281.49,5304.44 2286.16,5310.75 2291.43,5316.57 2297.25,5321.84 2303.56,5326.51 2310.29,5330.55 2317.39,5333.91 2324.78,5336.55 2332.39,5338.46 2340.16,5339.61 2347.37,5339.97
+3V3 on L3_PWR (split plane): 190 vertices, not listed, extent 2268.03,1894.03 4191.97,5339.97
+3V3_RF on L3_PWR (split plane): 3240,2699.9 4191.9,2699.9 4191.9,2644 4191.92,2643.91 4192.26,2639.61 4193.29,2635.32 4194.97,2631.25 4197.28,2627.49 4200.14,2624.14 4203.49,2621.28 4207.25,2618.97 4211.32,2617.29 4215.61,2616.26 4219.91,2615.92 4220,2615.9 4432.66,2615.9 4432.66,935.83 4432.71,935.32 4432.38,931.13 4431.28,926.56 4429.48,922.21 4427.02,918.2 4423.96,914.62 4420.39,911.56 4416.37,909.1 4412.03,907.3 4407.45,906.2 4403.26,905.87 4402.76,905.92 2311.17,905.92 2310.64,905.87 2305.56,906.2 2300.02,907.3 2294.68,909.12 2289.61,911.62 2284.92,914.75 2280.68,918.47 2276.96,922.72 2273.82,927.41 2271.32,932.47 2269.51,937.82 2268.41,943.35 2268.07,948.45 2268.13,948.99 2268.13,949 2268.13,1883.9 3140,1883.9 3140.08,1883.92 3146.17,1884.26 3152.26,1885.29 3158.19,1887 3163.9,1889.37 3169.31,1892.36 3174.35,1895.93 3178.95,1900.05 3183.07,1904.65 3186.64,1909.69 3189.63,1915.1 3192,1920.81 3193.71,1926.74 3194.74,1932.83 3195.08,1938.92 3195.1,1939 3195.1,2655 3195.03,2655.36 3195.39,2660.87 3196.54,2666.65 3198.43,2672.22 3201.03,2677.5 3204.3,2682.39 3208.18,2686.82 3212.61,2690.7 3217.5,2693.97 3222.78,2696.57 3228.35,2698.46 3234.13,2699.61 3239.64,2699.97
+5V on L3_PWR (split plane): 166 vertices, not listed, extent 2819.03,2626.04 4433.96,5339.97

## Other copper
L3_PWR (plane layer: these items are gaps in the copper):
  lines w10: 2248,1889 3140,1889 ccw(c3140,1939) 3190,1939 3190,2655 cw(c3240,2655) 3240,2705 4196,2705 ; 2813,5361 cw(c2813,5360) 2814,5360 2814,5087 2814,4357 ccw(c2864,4357) 2864,4307 3506,4307 3602,4307 cw(c3602,4280) 3629,4280 3629,4214 ccw(c3667,4214) 3667,4176 4092,4176 cw(c4092,4131) 4137,4131 4137,3767 cw(c4087,3767) 4087,3717 3867,3717 ccw(c3867,3667) 3817,3667 3817,3495 ccw(c3867,3495) 3867,3445 4147,3445 cw(c4147,3395) 4197,3395 4197,3382 4197,2955 4197,2644 ccw(c4220,2644) 4220,2621 4451,2621 ccw(c4451,2623) 4453,2623

## Text inside footprints (layer, text, board x,y; h text height)
U9: Top Overlay "*" at 2693,1350 h50 r90; Mechanical 13 "*" at 2762.94,1367.76 h50 r90